# Altium PCB PCB1.PcbDoc
Units mil, origin at the board's own origin, x right, y up, seen from the top; angles counter-clockwise.
Board outline 2005 x 2535 mil, 2 copper layers (Top Layer, Bottom Layer); 11 components, 8 nets, 53 pads, 13 vias.
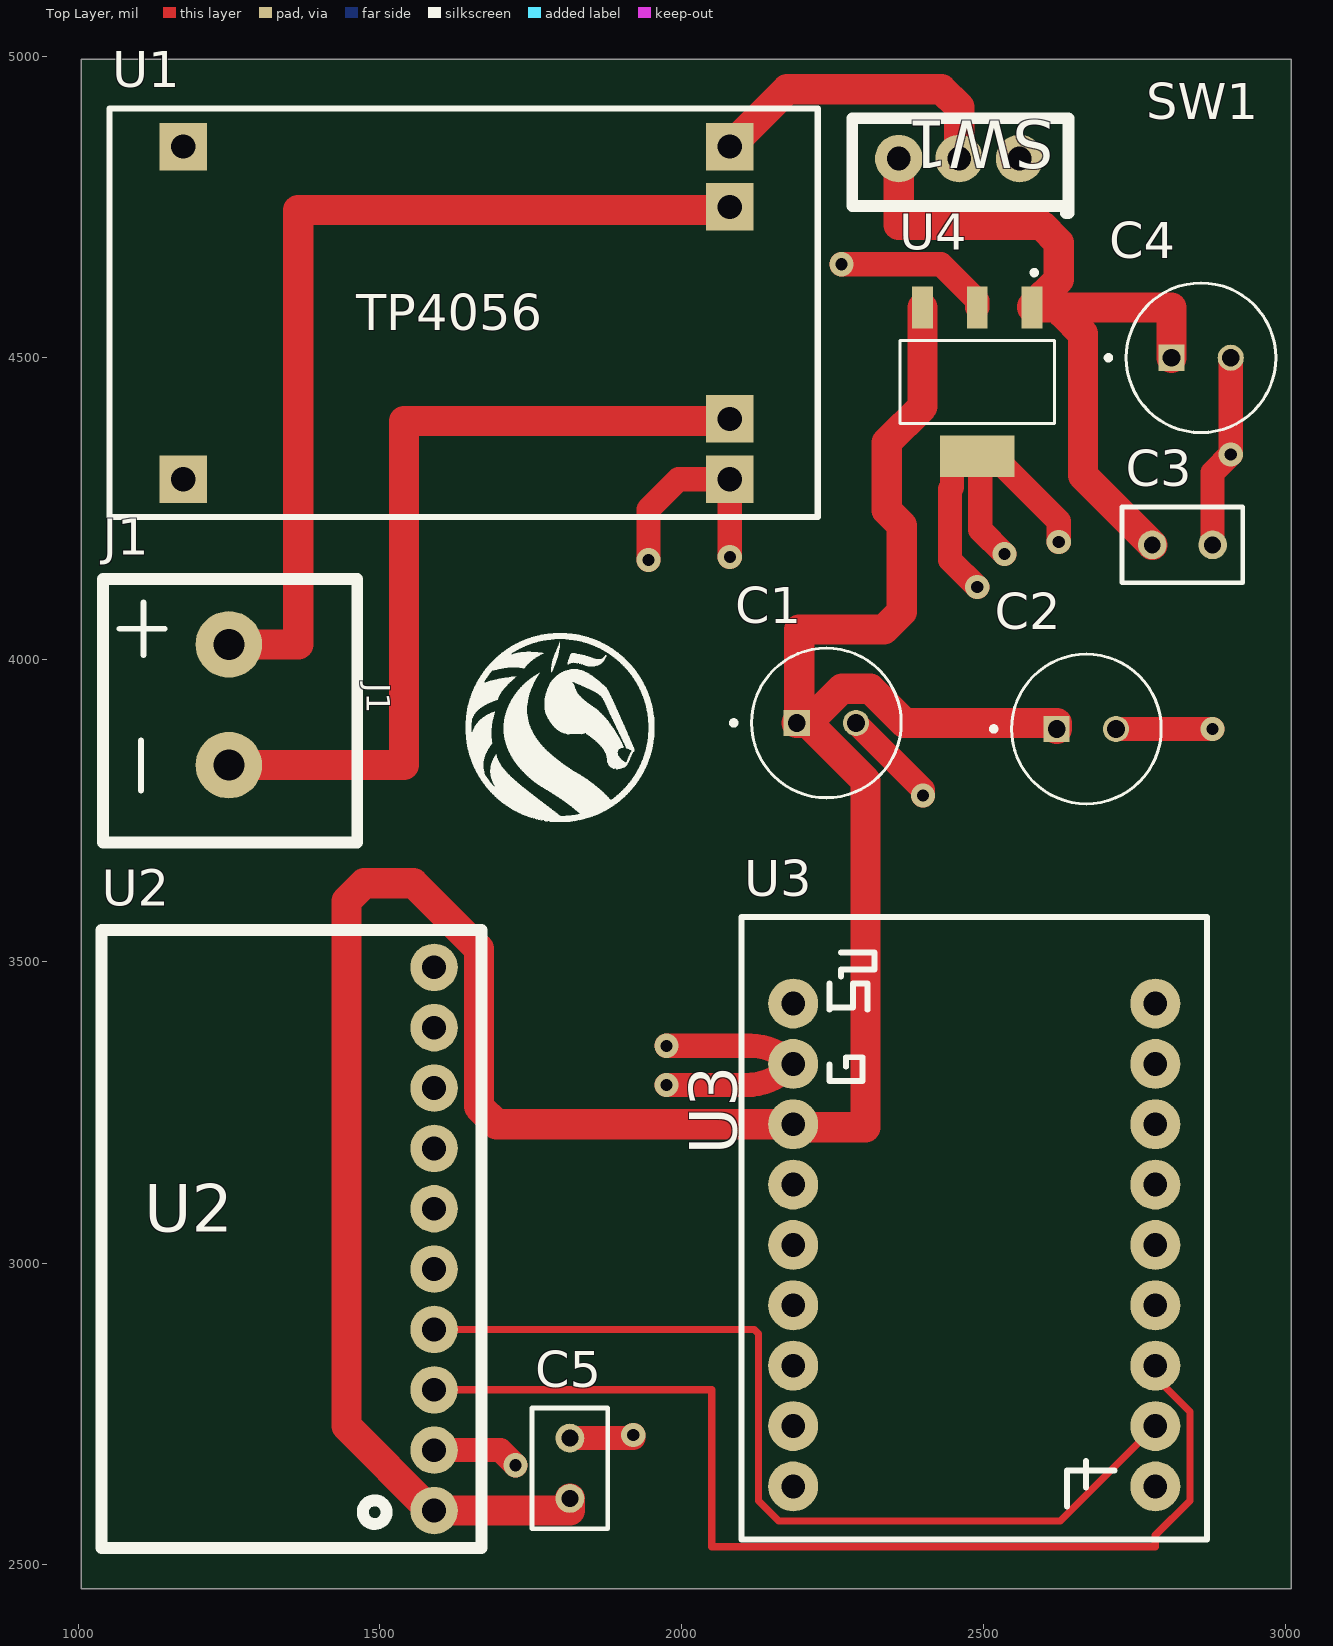
[diagram p0: Top Layer view]
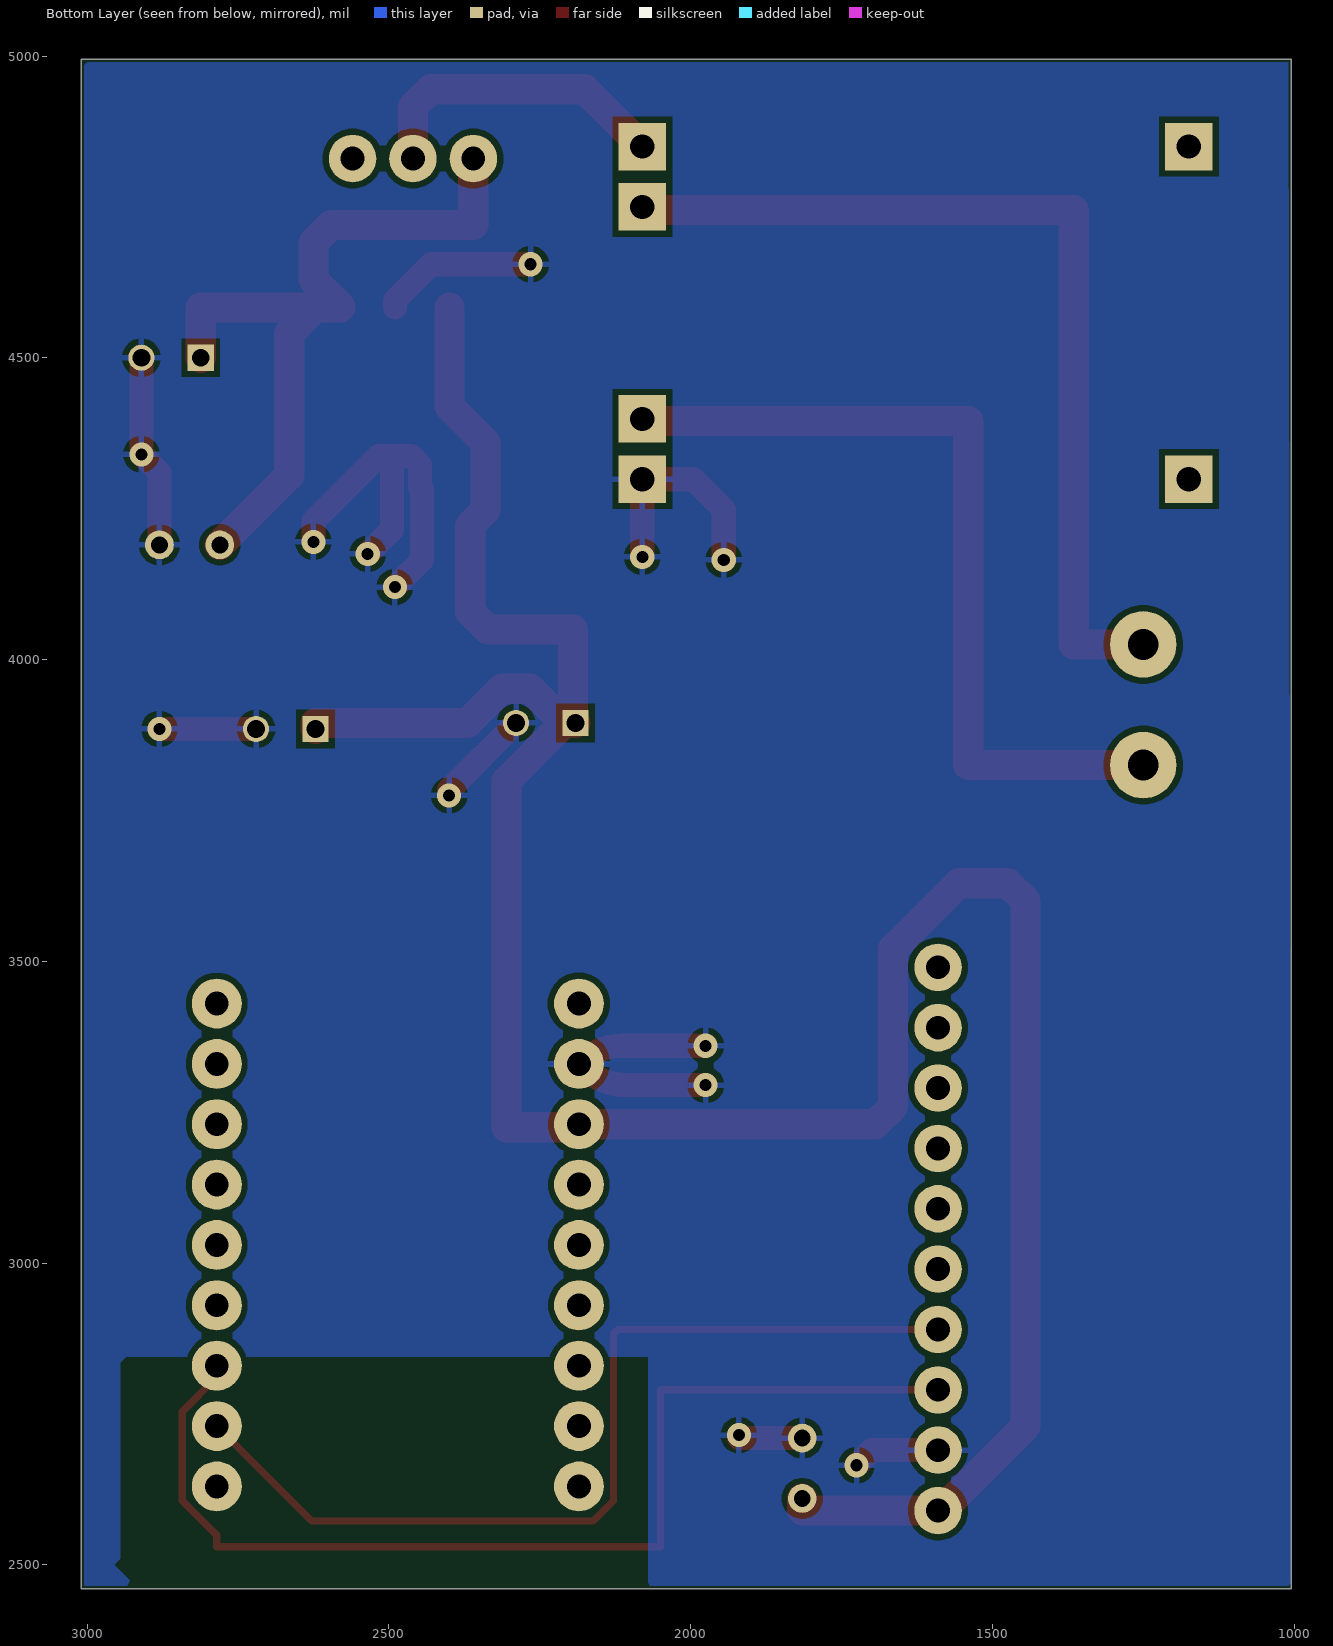
[diagram p1: Bottom Layer view, seen from below]
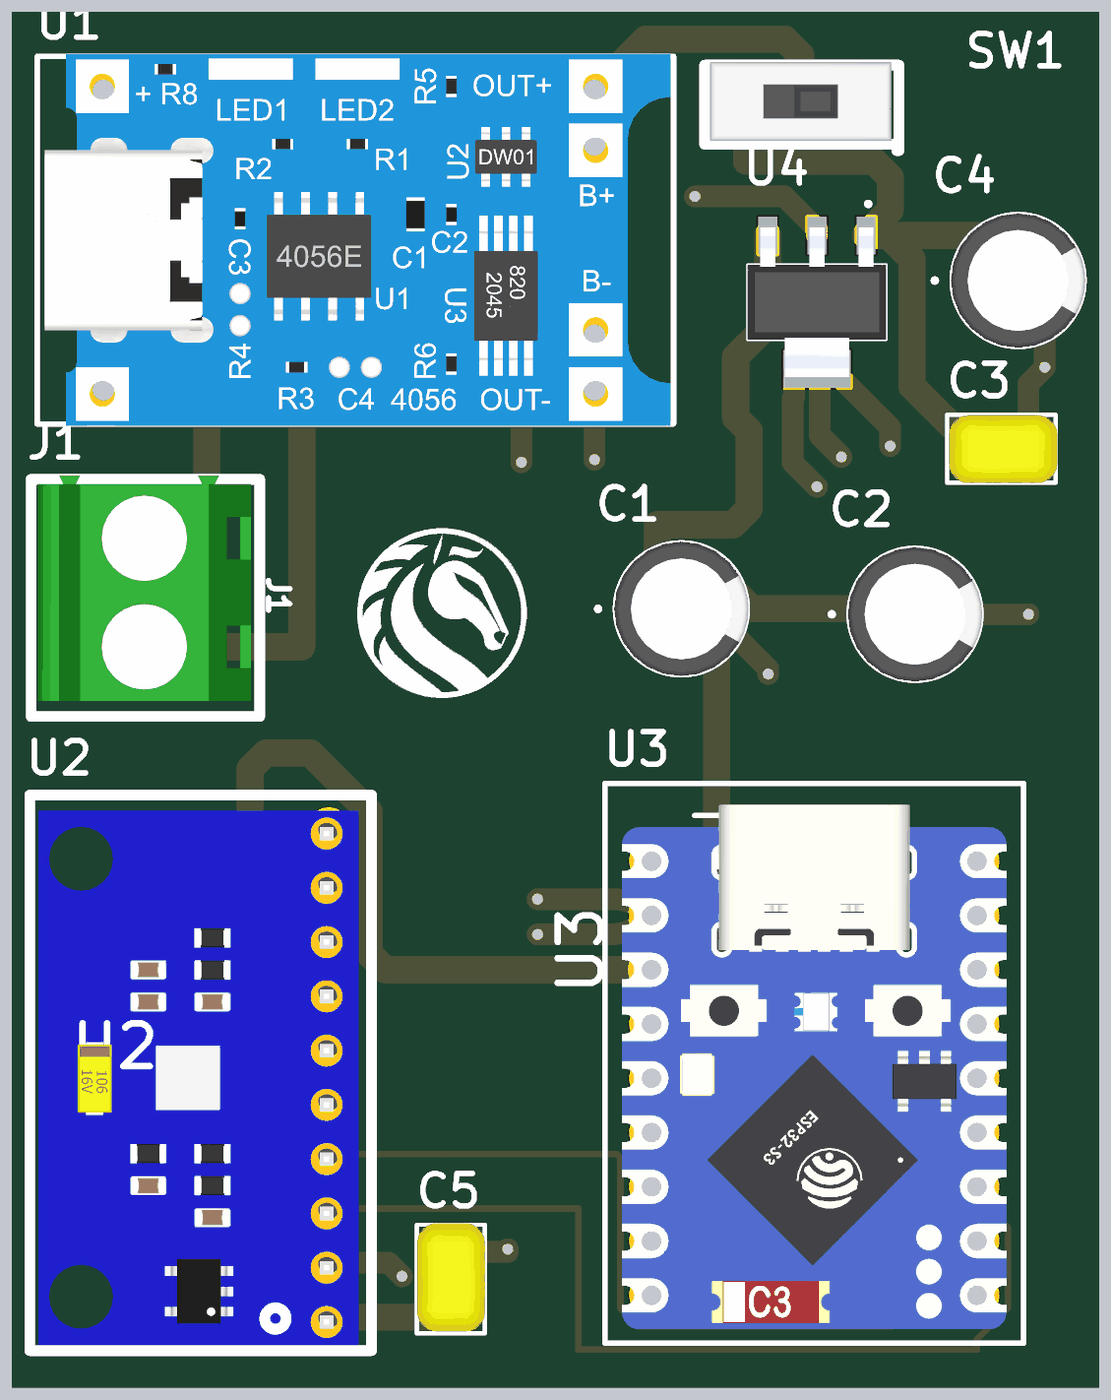
[diagram p2: 3D render of the assembled board from above, using the file's embedded part models]

## Layer stack, top to bottom
Top Solder: solder mask 0.4, Solder Resist, Dk 3.5
Top Layer: signal copper 1.4
Dielectric 1: dielectric 12.6, FR-4, Dk 4.8
Bottom Layer: signal copper 1.4
Bottom Solder: solder mask 0.4, Solder Resist, Dk 3.5

## Board outline
1005,2460 1005,4995 3010,4995 3010,2460

## Design rules (kind name [scope] priority, off if disabled: settings)
Clearance [All] p1: gap=10 ignorepadtopadclearanceinfootprint=FALSE
PolygonConnect [All] p1: connectstyle=Relief reliefconductorwidth=10 reliefentries=4 polygonreliefangle="90 Angle" airgapwidth=10
RoutingVias [All] p1: holewidth=20 width=40 viastyle="Through Hole" minholewidth=20 minwidth=40 maxholewidth=20 maxwidth=40
SolderMaskExpansion [All] p1: expansion=4 istentingtop=FALSE
SupplyNets "Schematic Supply Nets_1" [InNet('VCC')] p1: voltage=0.000
SupplyNets "Schematic Supply Nets" [InNet('GND')] p2: voltage=0.000
Width [All] p1: maxlimit=60 minlimit=10 preferedwidth=12 minimp=50.000000 maximp=50.000000 favimp=50.000000
30 further rules are at their usual default settings.

## Components (designator, comment, footprint, x,y, rotation, side; value= is the part's Value field where it differs from the comment)
C1 "100uF cap" "electrytic cap" 2240,3895 r0 top value=100uF
C2 "10uF" "electrytic cap" 2670.79,3885 r0 top
C3 "100nF" "ceramic cap" 2830,4190 r180 top
C4 "10uF" "electrytic cap" 2860.79,4500 r0 top
C5 "100nF" "ceramic cap" 1815,2660 r270 top
J1 "klemens" PCB_Klemens 1250,3925 r270 top
SW1 "Slide switch" "slide switch" 2460,4830 r180 top
U1 "tp4056" tp4056 1076.06,4235.83 r0 top
U2 "MPU9250" mpu9250 1590,3040 r0 top
U3 "esp32s3mini" ESP32_S3_MINI 2485,3030 r90 top
U4 "MCP1825S-SOT223" "SOT-223 - regulator" 2490,4460 r270 top

## Footprints (in the part's own frame and the unit in brackets; to place one, negate y for a bottom-side part, rotate by r counter-clockwise, add the part's x,y. Pads: shape width x height; smd on the part's side, far side on the other; paste and mask are expansions set on the pad)
"ceramic cap" [mm]
  round 1.21 hole 0.71: 1(-1.27,0) 2(1.27,0)
  silkscreen extent -2.54,-1.59 2.54,1.59, body extent -2.62,-1.57 2.45,1.61, height 6.34
"electrytic cap" [mm]
  rect 1.1x1.1 hole 0.75: 1(-1.25,0)
  round 1.1 hole 0.75: 2(1.25,0)
  silkscreen extent -4,-3.15 3.15,3.15, body extent -3.15,-3.15 3.15,3.15, height 11.2
ESP32_S3_MINI [mm]
  round 2.1 hole 1 mask+0.05: 1(10.16,7.62) 2(7.62,7.62) 3(5.08,7.62) 4(2.54,7.62) 5(0,7.62) 6(-2.54,7.62) 7(-5.08,7.62) 8(-7.62,7.62) 9(-10.16,7.62) 10(10.16,-7.62) 11(7.62,-7.62) 12(5.08,-7.62) 13(2.54,-7.62) 14(0,-7.62) 15(-2.54,-7.62) 16(-5.08,-7.62) 17(-7.62,-7.62) 18(-10.16,-7.62)
  silkscreen extent -12.4,-9.8 13.8,9.8, body extent -11.75,-9 12.8,9, height 4.71
mpu9250 [mm]
  round 2 hole 1 mask+0.025: 1(0,-11.43) 2(0,-8.89) 3(0,-6.35) 4(0,-3.81) 5(0,-1.27) 6(0,1.27) 7(0,3.81) 8(0,6.35) 9(0,8.89) 10(0,11.43)
  silkscreen extent -14,-13 2,13, body extent -13.6,-12.93 1.4,12.47, height 1.7
PCB_Klemens [mm]
  round 2.8 hole 1.3 mask+0.05: 1(-2.54,0) 2(2.54,0)
  silkscreen extent -5.3,-5.3 5.8,5.4, body extent -5.48,-5 5.08,5, height 14
"slide switch" [mm]
  round 2 hole 1 mask+0.025: 1(-2.54,0) 2(0,0) 3(2.54,0)
  silkscreen extent -4.6,-1.7 4.5,2.3, body extent -4.25,-1.85 4.25,1.85, height 7.15
"SOT-223 - regulator" [mm]
  rect 1.76x0.88 smd: 1(-3.125,2.3) 2(-3.125,0) 3(-3.125,-2.3)
  rect 1.76x3.14 smd: 4(3.125,0)
  silkscreen extent -4.7,-3.25 1.75,3.25, body extent -3.5,-3.25 3.5,3.25, height 1.8
tp4056 [mm]
  rect 2x2 hole 1.016: 1(2.5,15.6) 2(2.5,1.6) 3(25.5,15.6) 4(25.5,13.06) 5(25.5,4.14) 6(25.5,1.6)
  silkscreen extent -0.6,0 29.2,17.2, body extent -0.25,-0.1 29.05,17.3, height 4.14

## Part data
C2 C4: library part "10uF cap"
C3 C5: library part "100nf cap"
U4: Package=Package, Check_prices=https://www.snapeda.com/parts/SMT172-SOT223/Smartec/view-part/?ref=eda, MF=Smartec, MP=SMT172-SOT223, SnapEDA_Link=https://www.snapeda.com/parts/SMT172-SOT223/Smartec/view-part/?ref=snap

## Via types
v1: diameter 40, hole 20, Top Layer to Bottom Layer, 13 vias

## Nets (pads, with @x,y where several pads share a name; then routed paths per layer and width w, separated by ;. In a path a pad name is that pad's centre, name@x,y a point inside that pad or via, vN(x,y) a via of type N, cw(c..) or ccw(c..) an arc to the next point about the centre after c; other vN are vias at no path point)
B-: J1.2 U1.5 | length 1403.8
  Top Layer w50: J1.2 1540,3825 1540,4395 2080,4395 U1.5
GND: C1.2 C2.2 C3.1 C4.2 C5.1 U1.6 U2.2 U3.2 U4.2 U4.4 | length 2634.2
  Top Layer w40: U2.2 1700,2690 v1(1725,2665) ; C5.1 1920,2710 v1(1920,2715) ; v1(1945,4165) 1945,4248.82 1995,4298.82 U1.6 v1(2080,4170) ; v1(1975,3295) 2107.16,3295 ccw(c2107.16,3395) 2177.87,3324.29 U3.2@2184.29,3330.71 ; v1(1975,3360) 2113.58,3360 cw(c2113.58,3260) U3.2@2184.29,3330.71 ; U3.2 U3.2@2184.29,3330.71 ; v1(2265,4655) 2430,4655 2490,4595 U4.2 ; C1.2 2400,3784.21 v1(2400,3775) ; v1(2490,4120) 2445,4165 2445,4282.32 2448.19,4285.51 2448.19,4322.32 2462.83,4336.97 U4.4@2495,4336.97 ; v1(2535,4175) 2495,4215 U4.4@2495,4336.97 ; v1(2625,4195) 2625,4229.13 2517.17,4336.97 U4.4@2495,4336.97 ; C2.2 v1(2880,3885) ; C3.1 2880,4310 v1(2910,4340) C4.2
NetC1_1: C1.1 C2.1 C5.2 U2.1 U3.3 U4.3 | length 4587.1
  Top Layer w50: C5.2 1815,2590 1584.82,2590 1445,2729.82 1445,3600 1474.29,3629.29 1555.89,3629.29 1664.37,3520.81 1664.37,3259.29 1693.66,3230 U3.3 2185,3225 2305,3225 2305,3799.09 C1.1@2209.09,3895 ; C1.1 C1.1@2195,3895 ; U4.3 2399.45,4419.2 2340,4359.75 2340,4247.22 2365,4222.22 2365,4079.29 2335.71,4050 2195,4050 C1.1@2195,3895 ; C2.1 2621.57,3895 2369.33,3895 2312.68,3951.65 2265.75,3951.65 C1.1@2209.09,3895 ; C1.1@2195,3895 C1.1@2209.09,3895
NetC3_2: C3.2 C4.1 SW1.3 U4.1 | length 1272.1
  Top Layer w50: SW1.3 2360,4720 2595.71,4720 2625,4690.71 2625,4629.45 2580.55,4585 U4.1 2631.62,4583.03 2811.57,4583.03 C4.1 ; 2631.62,4573.39 2665,4540.01 2665,4305 C3.2
NetSW1_2: SW1.2 U1.3 | length 517.2
  Top Layer w50: U1.3 2175,4945 2430.71,4945 2460,4915.71 SW1.2
NetU2_3: U2.3 U3.16 | length 1802.5
  Top Layer w12: U2.3 2050,2790 2050,2530 2785,2530 2785,2548.91 2842.34,2606.25 2842.34,2753.75 2785,2811.09 U3.16
NetU2_4: U2.4 U3.17 | length 1553.7
  Top Layer w12: U2.4 2120.63,2890 2127.66,2882.97 2127.66,2606.25 2161.25,2572.66 2627.66,2572.66 U3.17
VCC: J1.1 U1.4 | length 1555
  Top Layer w50: J1.1 1365,4025 1365,4745 2080,4745 U1.4
pads on no net: SW1.1 U1.1 U1.2 U2.5 U2.6 U2.7 U2.8 U2.9 U2.10 U3.1 U3.4 U3.5 U3.6 U3.7 U3.8 U3.9 U3.10 U3.11 U3.12 U3.13 U3.14 U3.15 U3.18

## Polygon pours and split planes (outlines as drawn)
GND on Bottom Layer "GND_L02_P000" (solid, remove dead copper, pour order 0): 1010,4990 3000,4990 3005,4985 3005,2465 1010,2465 1005,2470 1005,2475

## Other copper
Multi-Layer:
  pour cut-out: 2070,2845 2935,2845 2945,2835 2945,2510 2955,2500 2920,2465 2075,2465 2070,2470

## Silkscreen, mask and mechanical layers (free items; w line width, h text height)
Top Overlay:
  drawing of 3 lines, arcs and shapes, not listed
Mechanical 1:
  drawing of 539 lines, arcs and shapes, not listed

## Text inside footprints (layer, text, board x,y; h text height)
U1: Top Overlay "TP4056" at 1461.06,4545.83 h60